# Altium PCB IR Sensor Module.PcbDoc
Units mm, origin at the board's own origin, x right, y up, seen from the top; angles counter-clockwise.
Board outline 42.67 x 20 mm, 2 copper layers (Top Layer, Bottom Layer); 9 components, 7 nets, 26 pads, 0 vias.
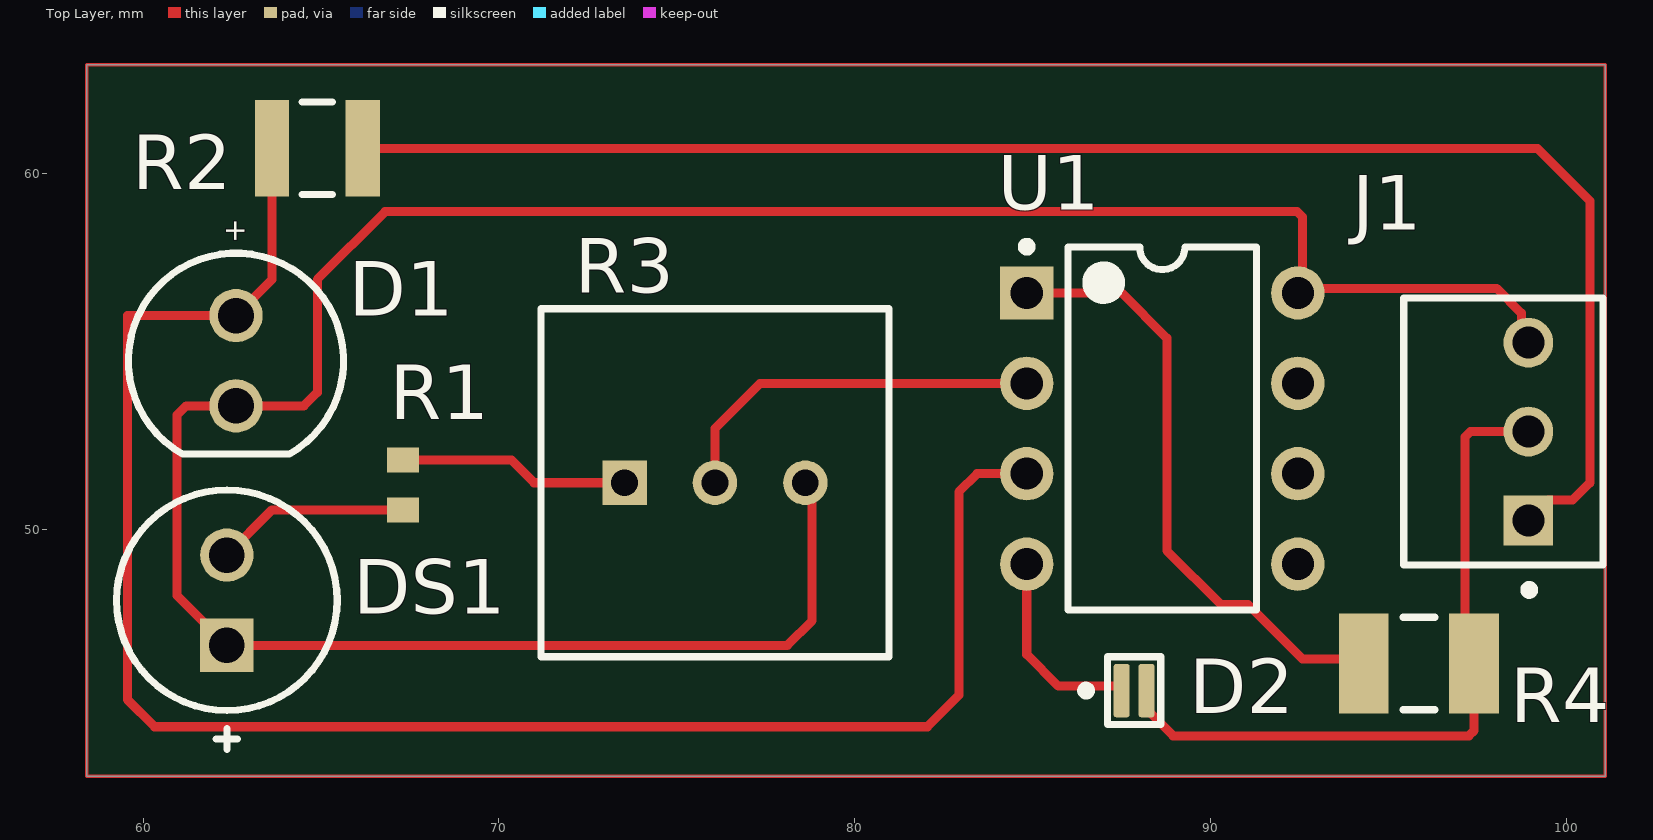
[diagram p0: Top Layer view]
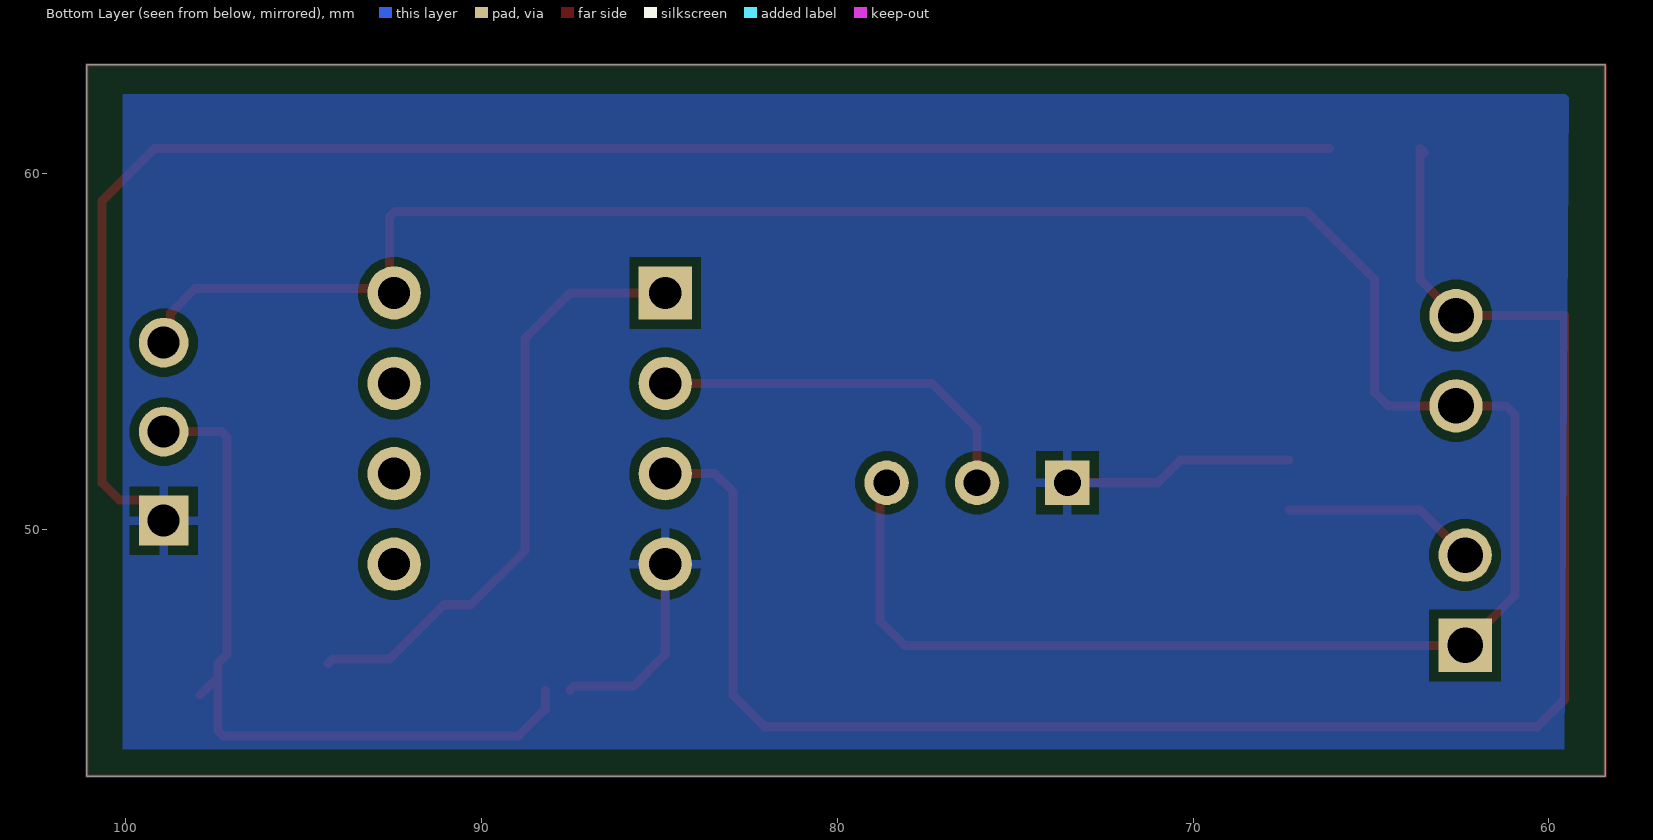
[diagram p1: Bottom Layer view, seen from below]
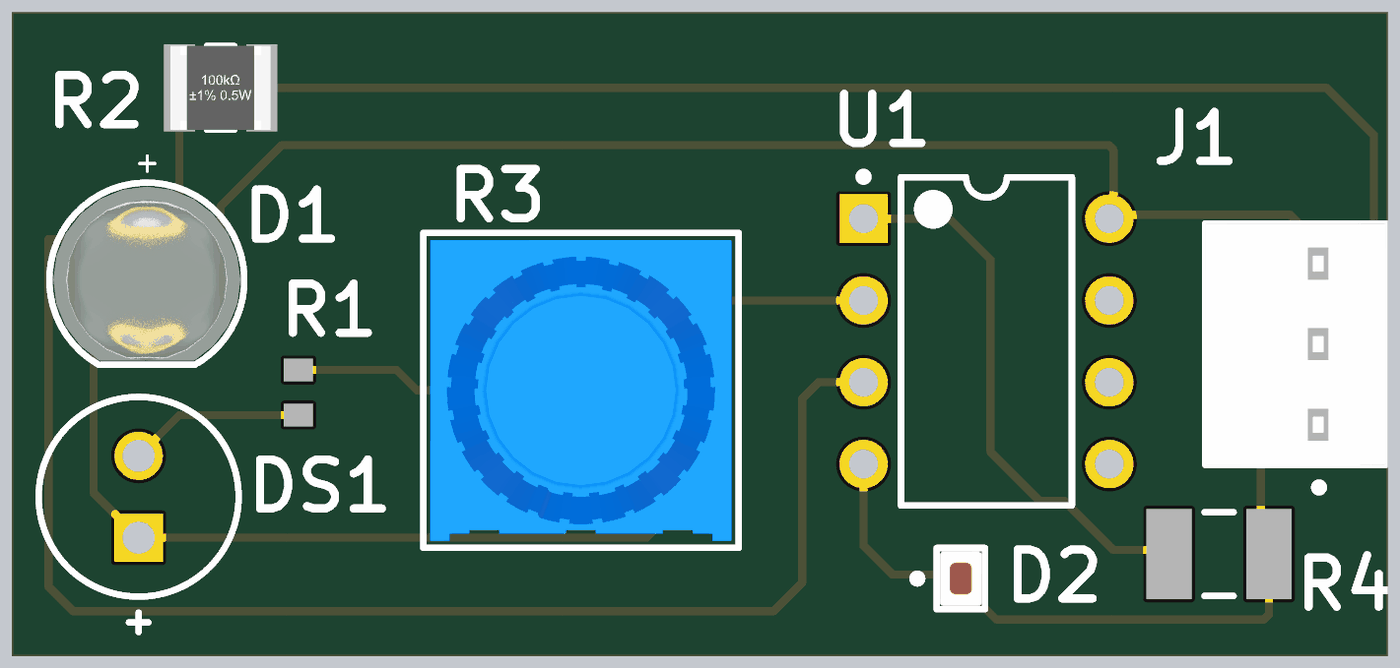
[diagram p2: 3D render of the assembled board from above, using the file's embedded part models]

## Layer stack, top to bottom
Top Solder: solder mask 0.0102, Solder Resist, Dk 3.5
Top Layer: signal copper 0.0356
Dielectric 1: dielectric 0.32, FR-4, Dk 4.8
Bottom Layer: signal copper 0.0356
Bottom Solder: solder mask 0.0102, Solder Resist, Dk 3.5

## Board outline
58.42,43.053 58.42,63.053 101.092,63.053 101.092,43.053

## Design rules (kind name [scope] priority, off if disabled: settings)
Clearance [All] p1: gap=0.254 ignorepadtopadclearanceinfootprint=FALSE except(0: Arc-Hole Track-Hole SMDPad-Hole THPad-Hole Via-Hole Fill-Hole Poly-Hole Region-Hole Text-Hole)
PolygonConnect [All] p1: connectstyle=Relief reliefconductorwidth=0.254 reliefentries=4 polygonreliefangle="90 Angle" airgapwidth=0.254
RoutingVias [All] p1: holewidth=0.711 width=1.27 viastyle="Through Hole" minholewidth=0.711 minwidth=1.27 maxholewidth=0.711 maxwidth=1.27
SolderMaskExpansion [All] p1: expansion=0.102 istentingtop=FALSE
Width [All] p1: maxlimit=0.254 minlimit=0.254 preferedwidth=0.254
30 further rules are at their usual default settings.

## Classes and differential pairs
component class "IR Sensor Module": D2 DS1 J1 R1 R2 R3 R4 U1

## Components (designator, comment, footprint, x,y, rotation, side; value= is the part's Value field where it differs from the comment)
D1 "1540051EC3590" WL-TDRB_D5.8H8.7 62.611,54.737 r90 top
D2 "LXZ1-PD02" FP-LXZ1-PD02-MFG 87.853,45.466 r0 top
DS1 "IR333C" EVRL-IR333C 62.357,48.006 r90 top
J1 "B3P-SHF-1AA(LF)(SN)" FP-B3P-SHF-1AA_LF_SN-MFG 98.233,52.745 r90 top
R1 "RC0603JR-10100RL" RESC1608X55X25NL10T15 67.31,51.243 r90 top
R2 "CRGCQ1210F10K" FP-CRGCQ1210-IPC_C 64.897,60.706 r0 top value=10KΩ
R3 "COM-09806" FP-COM-09806-MFG 76.073,51.308 r0 top
R4 "CRCW1210330RJNTA" RESC3225X60X45ML20T20 95.859,46.228 r0 top
U1 "LM358AP" P0008A 88.646,52.832 r0 top

## Footprints (in the part's own frame and the unit in brackets; to place one, negate y for a bottom-side part, rotate by r counter-clockwise, add the part's x,y. Pads: shape width x height; smd on the part's side, far side on the other; paste and mask are expansions set on the pad)
EVRL-IR333C [mm] "TH, 2-Leads, Radius 2.95mm, Pitch 2.54mm"
  rect 1.5x1.5 hole 1: 1(-1.27,0)
  round 1.5 hole 1: 2(1.27,0)
  silkscreen extent -4.2,-3.1 3.1,3.1, body extent -2.95,-2.95 2.95,2.95, height 10.4
FP-B3P-SHF-1AA_LF_SN-MFG [mm]
  rect 1.4x1.4 hole 0.9 paste-1000 mask+0: 1(-2.5,-0.7)
  round 1.4 hole 0.9 paste-1000 mask+0: 2(0,-0.7) 3(2.5,-0.7)
  silkscreen extent -4.57,-2.8 3.75,2.8, body extent -3.85,-2.9 3.85,2.9, height 0.25
FP-COM-09806-MFG [mm]
  rect 1.25x1.25 hole 0.75 paste-1000 mask+0: 1(-2.54,0)
  round 1.25 hole 0.75 paste-1000 mask+0: 2(0,0) 3(2.54,0)
  silkscreen extent -4.89,-4.89 4.89,4.89, body extent -4.99,-4.99 4.99,4.99, height 0.25
FP-CRGCQ1210-IPC_C [mm]
  rect 0.958x2.706 smd paste+0 mask+0: 1(-1.277,0) 2(1.277,0)
  silkscreen extent -0.42,-1.3 0.42,1.3, body extent -1.86,-1.5 1.86,1.5, height 0.25
FP-LXZ1-PD02-MFG [mm]
  rrect33% 0.45x1.5 smd paste-1000 mask+0: 1(-0.35,0) 2(0.35,0)
  silkscreen extent -1.47,-0.95 0.75,0.95, body extent -0.75,-0.95 0.75,0.95, height 0.25
P0008A [mm] "DIP, 8-Leads, Body 10.15x6.6mm, Pitch 2.54mm"
  rect 1.5x1.5 hole 0.9: 1(-3.81,3.81)
  round 1.5 hole 0.9: 2(-3.81,1.27) 3(-3.81,-1.27) 4(-3.81,-3.81) 5(3.81,-3.81) 6(3.81,-1.27) 7(3.81,1.27) 8(3.81,3.81)
  silkscreen extent -3.93,-5.1 2.65,5.23, body extent -3.95,-5.07 3.95,5.07, height 5.08
RESC1608X55X25NL10T15 [mm] "Chip Resistor, 2-Leads, Body 1.60x0.80mm, IPC Medium Density"
  rect 0.7x0.9 smd: 1(-0.7,0) 2(0.7,0)
  body extent -0.85,-0.45 0.85,0.45, height 0.55
RESC3225X60X45ML20T20 [mm] "Chip Resistor, 2-Leads, Body 3.20x2.50mm, IPC Low Density"
  rect 1.4x2.8 smd: 1(-1.55,0) 2(1.55,0)
  silkscreen extent -0.45,-1.3 0.45,1.3, body extent -1.7,-1.35 1.7,1.35, height 0.6
WL-TDRB_D5.8H8.7 [mm] "THT Photodiode Round Black, body diameter 5.8mm"
  round 1.5 hole 1: 1(-1.27,0) 2(1.27,0)
  silkscreen extent -2.63,-3.02 3.02,3.02, body extent -2.5,-2.9 2.9,2.9, height 9.2

## Part data
D1: library part CMP-03913-98667841-1, "1540051EC3590 WL-TDRB THT Photodiode Round Black", Max Operating Temperature=85°C, Max Reverse Voltage (DC)=30V, Min Operating Temperature=-40°C, Height=8.7mm, Length=5.8mm, NexarPartId=98667841, RoHS=Compliant, Viewing Angle=35°, Width=5mm
D2: library part CMP-224022-000002-1, "LUXEON Z High Power SMT LED Emitter Red Lambertian 500mA 2.15 V", Lead Free="Lead Free", RoHS Compliant=Yes
DS1: library part CMP-2000-05108-1, "Infrared LED, 1.2 V, -40 to 85 degC, 2-Pin Radial, RoHS, Bulk", Forward Current=20mA, Forward Voltage=1.2V, Illumination Color=Infrared, Manufacturer="Everlight Electronics", Maximum Forward Current=1A, Maximum Operating Temperature=+85C, Minimum Operating Temperature=-40C, Package / Case=T-13/4, Power Rating=150mW, Brand=Everlight, Datasheet URL=http://www.everlight.com/file/ProductFile/201407061521223111.pdf, Datasheet Version=May-13, Factory Pack Quantity=500, Lens Shape=Dome, Manufacturer URL=http://www.everlight.com/, Mounting Style=ThroughHole, Operating Voltage=1.2V, Product Category=InfraredEmitters, Radiant Intensity=12mW/sr, RoHS=Details, Viewing Angle=40deg, Wavelength=940nm
J1: library part CMP-17439-000681-1, "CONN HEADER VERT 3POS 2.5MM", Color=Natural, Current Rating=3A, Flammability Rating="UL94 V-0", Voltage Rating=250V, Connector Type=Header, Contact Finish - Mating=TIN, Contact Material=Brass, Contact Mating Length=0.236inch, Contact Plating=Tin, Contact Shape=Square, Contact Type="Male Pin", Fastening Type=Friction, Insulation Color=Natural, Insulation Material=Nylon, Lead Free="Lead Free", Mated Stacking Heights=14.9mm, Mount="Through Hole", Number of Contacts=3, Number of Positions=3, Number of Rows=1, Orientation=Straight, Packaging=Bulk, Pitch=0.098inch, Series=NH, Termination=Solder
R1: library part CMP-2000-04302-1, Manufacturer=Yageo, Part Number=RC0603JR-10100RL
R2: library part CMP-03211-005276-1, "CRGCQ1210 10KΩ 0.5W ±100ppm/°C 1% 200V", Ambient Temperature Range High=+70°C, Manufacturer="TE Connectivity", Package=CRGCQ1210, Power Rating=0.5W, Resistance=10KΩ, Temperature="-55°C to +155°C", Temperature Coefficient=±100ppm/°C, Temperature Range High=+155°C, Temperature Range Low=-55°C, Tolerance=0.01, Voltage Rating=200V, Automotive=Yes, Automotive Grade="Grade 913", Category=Res, ComponentLink2Description=Datasheet, ComponentLink2URL=https://www.te.com/commerce/DocumentDelivery/DDEController?Action=showdoc&DocId=Data+Sheet%7F1773204-3%7F1%7Fpdf%7FEnglish%7FENG_DS_1773204-3_1.pdf%7F4-2176347-922, Composition="Thick Film", Device Class L1="Passive Components", Device Class L2=Resistors, Device Class L3="Chip SMD Resistors", Height=0.65mm, Ipc Land Pattern Name=RESC310260X55, Lead Free=Yes, Manufacturer Part Number=CRGCQ1210F10K, Mouser Description="Res, Aec-Q200, Thick Film, 10K, 1%, 1210", Octopart=https://octopart.com/crgcq1210f10k-te+connectivity-91018348, RoHS=TRUE, Series=CRGCQ
R3: library part CMP-02417-76381460-1, "COM-09806 Res Cermet Trimmer 10K Ohm 10% 0.5W(1/2W) 1(Elec)/1(Mech)Turns 3.15mm (9.53 X 9.53 X 4.83mm) Pin Thru-Hole", Max Operating Temperature=125°C, Min Operating Temperature=-55°C, Power Rating=500mW, Resistance=10kΩ, Temperature Coefficient=100ppm/°C, Tolerance=10%, Composition=Cermet, Height=10.92mm, NexarPartId=76381460
R4: library part CMP-2005-00707-1, "RES SMD 330 OHM 5% 1/2W 1210", Manufacturer="Vishay Dale", Part Number=CRCW1210330RJNTA
U1: library part CMP-1685-00017-1, "Dual Operational Amplifier, 3 to 32 V, 0 to 70 degC, 8-Pin PDIP (P), Pb-Free (RoHS), Tube", Case Code (Imperial)=0603, Case Code (Metric)=1608, Colour=Orange, Forward Current="20 mA", Forward Voltage="2 V", Max Operating Temperature="85 degC", Min Operating Temperature="-55 degC", Package Quantity=3000, Power Rating="75 mW", Case\Package=0603, ComponentLink1Description="Manufacturer URL", ComponentLink1URL=http://www.ti.com/, ComponentLink2Description=Datasheet, ComponentLink2URL=http://www.ti.com/lit/ds/symlink/lm358a.pdf, ComponentLink3Description="Package Specification", ComponentLink3URL=http://www.ti.com/lit/ml/mpdi001b/mpdi001b.pdf, DatasheetVersion="SLOS068T, 04/2015", Height="1.1 mm", Illumination Colour=Orange, Length="1.6 mm", Lens Style=Diffused, Luminous Intensity="90 mcd", Mount="Surface Mount", Nominal Vf="2 V", PackageDescription="8-Pin Double In-line Package, Body 9.59 x 6.35 mm, Pitch 2.54 mm", PackageReference=P0008A, PackageVersion="4040082/E, 04/2010", Packaging="Tape and Reel", Pins=2, Radiation Hardening=No, RoHSCompliant=true, Viewing Angle="130 degrees", Width="0.8 mm"

## Nets (pads, with @x,y where several pads share a name; then routed paths per layer and width w, separated by ;. In a path a pad name is that pad's centre, name@x,y a point inside that pad or via, vN(x,y) a via of type N, cw(c..) or ccw(c..) an arc to the next point about the centre after c; other vN are vias at no path point)
GND: D2.1 J1.1 R1.2 R2.2 R3.1 U1.4 | length 57.3
  Top Layer w0.254: R2.2 99.187,60.706 100.661,59.232 100.661,51.308 100.171,50.818 99.506,50.818 J1.1 ; R1.2 70.358,51.943 70.993,51.308 R3.1 ; U1.4 84.836,46.482 85.725,45.593 87.405,45.593 87.503,45.495 D2.1
NetD1_1: D1.1 DS1.1 J1.3 R3.3 U1.8 | length 72.8
  Top Layer w0.254: R3.3 78.804,51.117 78.804,47.435 78.105,46.736 DS1.1 60.96,48.133 60.96,53.213 61.214,53.467 D1.1 64.516,53.467 64.897,53.848 64.897,57.023 66.802,58.928 92.434,58.928 92.583,58.779 U1.8@92.583,56.88 ; U1.8@92.694,56.769 98.044,56.769 98.74,56.073 98.74,55.438 J1.3
NetD1_2: D1.2 R2.1 U1.3 | length 51
  Top Layer w0.254: R2.1@63.5,60.586 R2.1 63.62,57.016 D1.2 59.563,56.007 59.563,45.212 60.325,44.45 82.042,44.45 82.931,45.339 82.931,51.054 83.439,51.562 U1.3
NetD2_2: D2.2 J1.2 R4.2 | length 21
  Top Layer w0.254: D2.2 88.203,44.941 88.948,44.196 97.26,44.196 97.409,44.345 R4.2@97.409,45.847 ; R4.2@97.917,45.339 R4.2@97.409,45.847 ; J1.2 97.304,52.745 97.155,52.596 97.155,46.482 R4.2 R4.2@97.409,45.847
NetDS1_2: DS1.2 R1.1 | length 5.5
  Top Layer w0.254: DS1.2 63.624,50.543 R1.1
NetR3_2: R3.2 U1.2 | length 10.8
  Top Layer w0.254: R3.2 76.073,52.832 77.343,54.102 U1.2
NetR4_1: R4.1 U1.1 | length 17.3
  Top Layer w0.254: U1.1 87.503,56.642 88.773,55.372 88.773,49.403 90.297,47.879 91.059,47.879 92.583,46.355 94.182,46.355 R4.1
pads on no net: U1.5 U1.6 U1.7
copper on no net: | length 125.3
  Top Layer w0.1: 58.42,43.053 101.092,43.053 101.092,63.053 58.42,63.053 58.42,43.053

## Polygon pours and split planes (outlines as drawn)
GND on Bottom Layer "GND_L02_P000" (solid, pour order 0): 59.563,43.815 100.076,43.815 100.076,62.23 59.436,62.23

## Text inside footprints (layer, text, board x,y; h text height)
D1: Top Overlay "+" at 62.861,58.037 h0.61 r90